# Altium PCB DC_AC_Inverter.PcbDoc (part 4 of 4)
Units mil, origin at the board's own origin, x right, y up, seen from the top; angles counter-clockwise.
Board outline 6496.06 x 4566.93 mil, 6 copper layers (L1, L2, L3, L4, L5, L6), stack 22.312 mil thick; 133 components, 65 nets, 349 pads, 134 vias.
Unrouted connection lines stored in the file: 226.
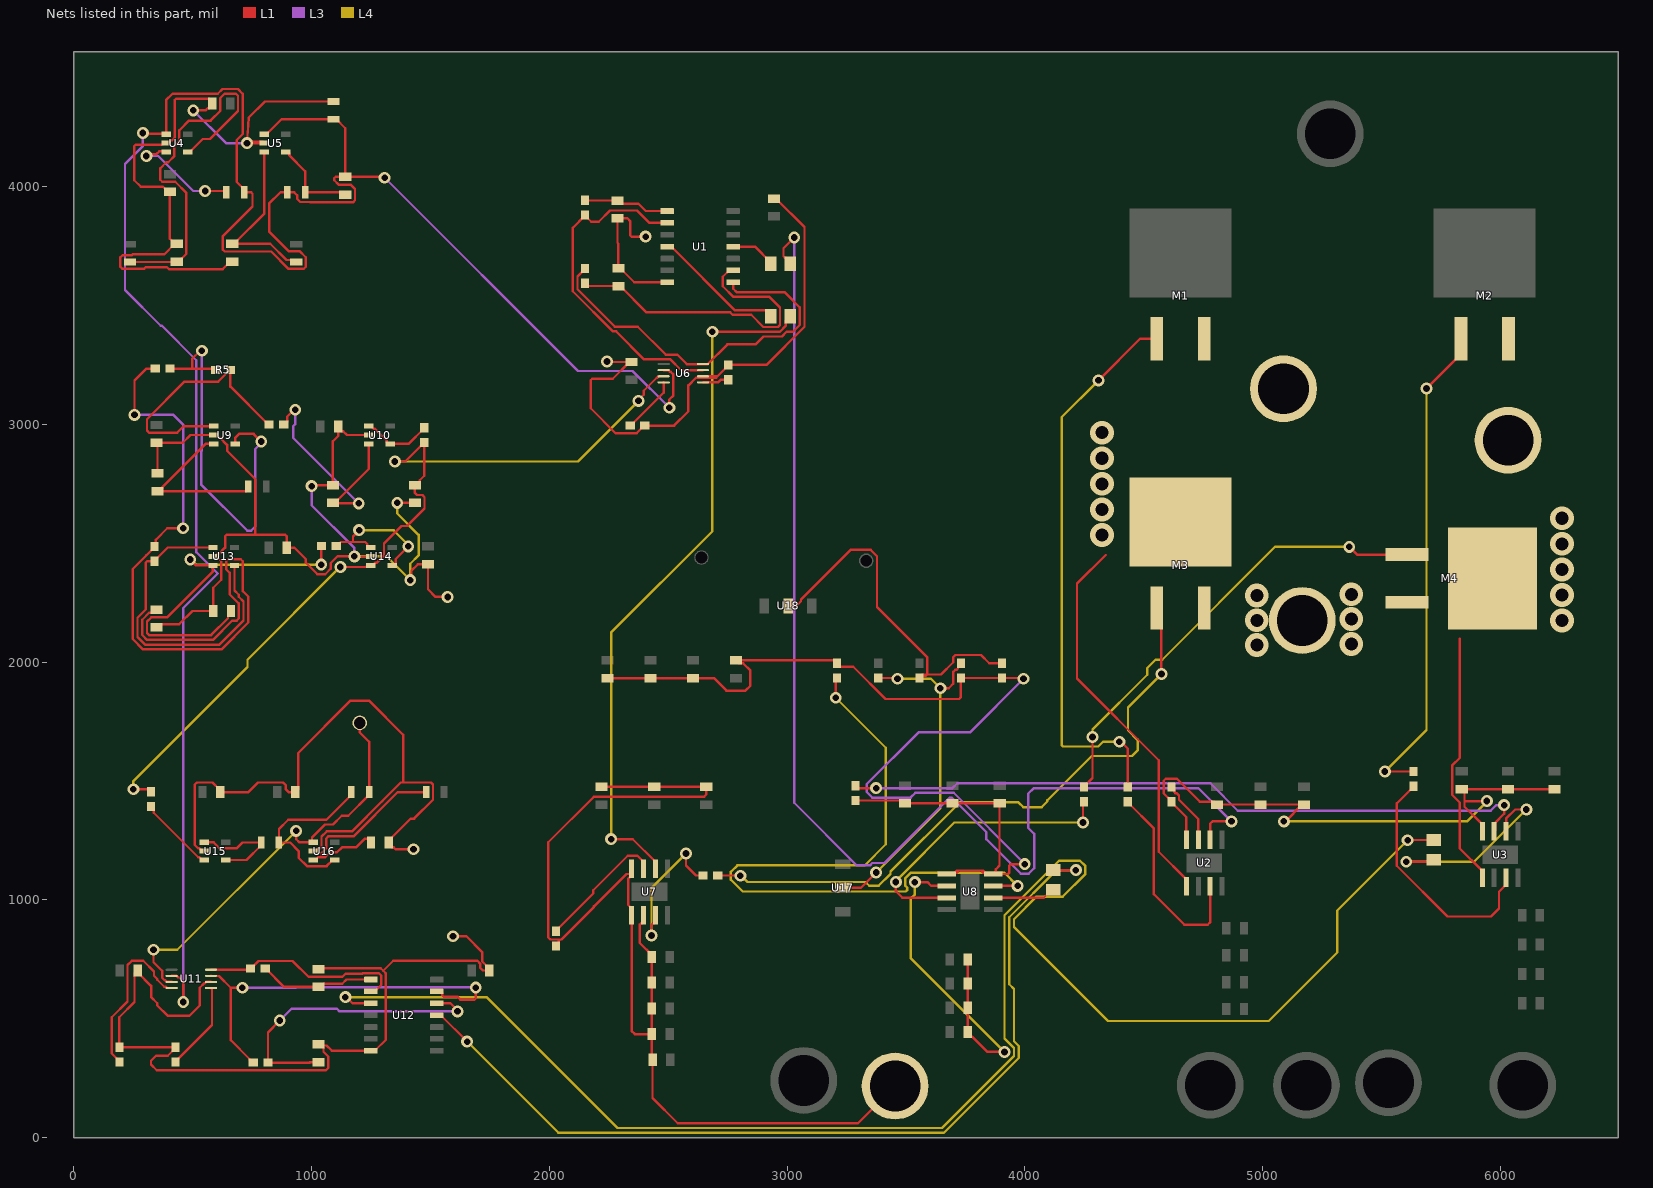
[diagram p6: the nets of this part, all layers, seen from the top]

## Via types
v1: diameter 50, hole 28, L1 to L6, 94 vias
v2: diameter 100, hole 55, L1 to L6, 26 vias
v3: diameter 80, hole 48, L1 to L6, 14 vias

## Nets (pads, with @x,y where several pads share a name; then routed paths per layer and width w, separated by ;. In a path a pad name is that pad's centre, name@x,y a point inside that pad or via, vN(x,y) a via of type N, cw(c..) or ccw(c..) an arc to the next point about the centre after c; other vN are vias at no path point) (continued)
GND: C1.2 C2.1 C4.2 C5.2 C7.1 C8.1 C9.1 C10.2 C11.1 C12.2 C13.2 C14.1 C15.1 C16.1 C17.1 C18.2 C19.2 C20.2 C21.2 C22.2 C23.2 C24.1 C25.2 C26.2 C27.2 C31.1 C34.1 C36.1 C37.1 C38.2 C39.2 C40.1 C41.2 C42.1 C43.1 C44.1 C45.1 C46.1 C47.1 C48.1 C49.1 C50.1 C51.1 C52.1 C53.1 C55.1 C56.1 C57.2 C58.1 M3.Source M4.Source P5.1 P6.1 R1.2 R19.2 R20.1 R21.2 R22.2 R23.1 R24.2 R28.1 R29.1 R33.1 R35.2 U1.7 U2.4 U3.4 U4.2 U5.2 U6.6 U7.4 U7.5 U7.6 U8.4 U8.5 U8.6 U9.2 U10.2 U11.6 U12.7 U13.2 U14.2 U15.2 U16.2 | length 30754.9
  L1 w10: C45.1@347.82,2146.18 360.54,2158.9 442.73,2158.9 498.91,2215.08 C49.1@585.94,2215.08 585.94,2313.09 619.51,2346.66 619.51,2424.09 604.98,2438.62 590.65,2438.62 U13.2@584.83,2444.45 593.68,2444.45 605.26,2456.02 610.73,2456.02 636.26,2481.56 636.26,2529.14 642.12,2535 763.02,2535 ; C42.1@351.69,2793.82 351.69,2918.88 C21.2@347.82,2922.76 457.92,2922.76 490.4,2955.24 U9.2@588.76,2955.24 597.62,2955.24 609.2,2943.66 614.66,2943.66 644.63,2913.69 644.63,2888.89 763.02,2770.5 763.02,2535 ; C39.2@432.41,3759.84 C39.2@424.54,3759.84 ; v1(501.97,4320.87) 553.15,4320.87 562.09,4329.8 569.96,4329.8 582.68,4342.52 C18.2@582.68,4350.39 ; 569.37,1193.23 557.8,1204.8 540.08,1204.8 528.5,1216.38 523.04,1216.38 508.35,1231.07 508.35,1484.64 517.13,1493.43 583.15,1493.43 615.87,1460.71 C26.2@615.87,1452.83 733.97,1452.83 774.56,1493.43 879.95,1493.43 891.53,1481.85 891.53,1464.41 903.11,1452.83 C27.2@930.83,1452.83 943.54,1465.55 943.54,1617.8 1163.65,1837.91 1241.31,1837.91 1385,1694.22 1385,1493.43 ; U11.6@576.77,654.53 556.85,654.53 550.59,648.27 547.5,648.27 529.28,630.05 529.28,555.33 485.44,511.5 395.26,511.5 350.83,555.93 350.83,564.53 324.8,590.55 324.8,637.79 267.72,694.88 C13.2@267.72,702.76 255,690.04 255,570.07 190.94,506.01 R24.2@190.94,379.43 R35.2@427.17,379.43 427.17,376.87 394.39,344.09 345.33,344.09 324.49,323.24 324.49,306.68 348.23,282.94 520.98,282.94 521.04,282.99 1060.15,282.99 1070.12,292.96 1070.12,340.82 1050.12,360.82 C5.2@1050.12,378.98 ; C18.2@582.68,4353.27 582.68,4357.36 569.96,4370.08 429.52,4370.08 423.66,4364.22 423.66,4204.61 413.69,4194.65 408.23,4194.65 396.65,4183.07 378.94,4183.07 373.11,4177.24 367.39,4177.24 367.25,4177.1 259.86,4177.1 254,4171.25 254,4027.26 280.83,4000.43 373.58,4000.43 395.67,3978.35 C19.2@403.54,3978.35 403.54,3780.84 C39.2@424.54,3759.84 ; C40.1@658.14,3685.04 625.42,3652.32 400.61,3652.32 391.82,3661.11 301.53,3661.11 294.71,3654.29 204.42,3654.29 195.63,3663.08 195.63,3703.06 204.42,3711.85 244.5,3711.85 247.75,3715.09 379.79,3715.09 C39.2@424.54,3759.84 ; v1@741.67,4196.4 749.17,4188.9 795.35,4188.9 U5.2@801.18,4183.07 v1(728.35,4183.07) 735.76,4290.76 803.27,4358.27 R1.2@1092.52,4358.27 ; v1(1000,2740) 1004.61,2744.61 C37.1@1089.23,2744.61 1089.23,2928.62 1111.93,2951.32 C20.2@1111.93,2983.78 ; U16.2@1006.98,1204.8 1015.84,1204.8 1027.42,1216.38 1032.88,1216.38 1041.67,1225.16 1041.67,1266.35 1063.35,1288.03 1168.57,1288.03 ; C5.2@1029.53,391.69 1033.96,387.26 1062.74,387.26 1085.32,364.68 1265.75,364.68 1312.56,411.5 1312.56,689.82 1301.19,701.19 ; C4.2@1029.53,708.66 1032.36,711.5 1290.88,711.5 1301.19,701.19 ; C20.2@1111.93,2991.65 C20.2@1111.93,2983.78 ; 1169.57,1288.03 1296.22,1414.69 ; U10.2@1240.73,2955.24 1148.35,2955.24 1132.52,2971.06 1124.65,2971.06 C20.2@1111.93,2983.78 ; U14.2@1248.61,2444.45 1180.55,2444.45 v1(1180,2445) 1109.1,2445 1080.67,2416.57 1080.67,2393.3 1057.24,2369.87 1024.1,2369.87 975.71,2418.26 975.71,2432.48 927.32,2480.87 C23.2@894.61,2480.87 894.61,2529.14 888.75,2535 763.02,2535 ; 1296.93,1415.39 1374.96,1493.43 1385,1493.43 ; v1(1360,2670) 1360.2,2669.8 C43.1@1434.37,2669.8 ; v1(1415,2345) 1420,2350 1420,2385 1446.97,2411.97 C22.2@1489.49,2411.97 1489.49,2306.36 1521.71,2274.13 v1(1572.17,2274.13) ; v1(1428.86,1212.68) 1353.07,1212.68 1345.12,1220.63 1337.24,1220.63 1324.53,1233.35 C41.2@1324.53,1241.22 1324.53,1249.09 1416.85,1341.42 1431.18,1341.42 1510.79,1421.03 1510.79,1484.64 1502,1493.43 1385,1493.43 ; v1(1594.73,846.46) 1651.06,846.46 1717.16,780.36 1717.16,741.5 1748.03,710.63 C25.2@1748.03,702.76 1720.31,702.76 1708.74,714.33 1708.74,731.77 1697.16,743.35 1343.35,743.35 1301.19,701.19 ; R22.2@2027.56,805.61 2039.49,817.54 2039.49,827.27 2045.35,833.13 ; C17.1@2218.83,1475.54 C16.1@2441.27,1475.54 C47.1@2660,1475.54 2660,1442.82 2650.92,1433.74 2187.31,1433.74 1995.63,1242.06 1995.63,841.91 2004.42,833.13 2045.35,833.13 ; v1(2242.91,3264.49) 2244.92,3262.48 C38.2@2337.36,3262.48 ; C9.1@2245,1932.6 C10.2@2425,1932.6 C11.1@2605,1932.6 2692.2,1932.6 2744.91,1879.88 2825.09,1879.88 2845.59,1900.38 2845.59,1964.81 2815.72,1994.68 2797.72,1994.68 C57.2@2785,2007.4 3198.07,2007.4 3210,1995.47 R21.2@3210,1995.13 3210,1992.57 3221.93,1980.65 3278.61,1980.65 3414.25,1845 3724.14,1845 3730,1850.86 3730,1931.88 R28.1@3731.25,1933.13 R29.1@3905,1933.13 3991.87,1933.13 v1(3995,1930) ; C38.2@2345.24,3262.48 C38.2@2337.36,3262.48 ; U7.4@2346.26,1127.12 U7.4@2346.26,1114.22 ; U7.6@2396.26,935.63 2396.26,907.09 2390.83,901.65 2385.86,901.65 2380,895.8 2380,819.02 2431.28,767.75 C51.1@2431.28,759.87 C53.1@2431.28,651.61 C34.1@2431.28,543.34 C55.1@2431.28,435.07 ; v1(2405,3790) 2345.86,3790 2340,3795.86 2340,3855 2328.15,3866.85 C1.2@2286.67,3866.85 2286.67,3763.77 2290.61,3759.83 C2.1@2290.61,3656.76 2298.48,3656.76 2357.56,3597.68 U1.7@2495.87,3597.68 ; U6.6@2646.46,3202.44 2707.54,3202.44 ; C24.1@2945.67,3949.53 2953.54,3949.53 3073.25,3829.82 3073.25,3410.42 2913.04,3250.21 R23.1@2752.76,3250.21 2752.76,3247.65 2707.54,3202.44 ; R20.1@3288.61,1418 3483.69,1418 C48.1@3495.96,1405.73 C31.1@3695.43,1405.73 C50.1@3894.91,1405.73 3893.87,1404.7 3893.87,1143.87 3878.04,1128.04 3878.04,1113.9 U8.4@3872.61,1108.46 ; P5.1@3527.62,216.54 P5.1@3454.72,216.54 3298.19,60 2540,60 2434.23,165.77 C12.2@2434.23,326.8 2431.28,329.76 C55.1@2431.28,435.07 ; v1(3537.78,1074.49) 3590.51,1074.49 3606.54,1058.46 U8.6@3671.85,1058.46 ; U8.5@3671.85,1108.46 3700.39,1108.46 U8.5@3705.83,1113.9 ; C58.1@3759.72,749.03 C36.1@3759.72,647.33 C56.1@3759.72,545.62 C52.1@3759.72,443.91 3759.72,436.04 3772.43,423.32 3780.31,423.32 3843.63,360 v1(3915,360) ; U8.4@3867.52,1108.46 U8.4@3872.61,1108.46 ; v1(4000,1150) 3940.86,1150 3935,1144.14 3935,1114.32 3929.14,1108.46 U8.4@3872.61,1108.46 ; R19.2@4616.8,1410.44 4680,1347.24 U2.4@4680,1252.83 ; R19.2@4616.8,1413 4616.8,1415.56 4584.87,1447.49 4584.87,1500.7 4593.66,1509.49 4639.94,1509.49 4736.43,1413 4795.81,1413 C14.1@4808.07,1400.73 C8.1@4991.47,1400.73 C46.1@5167,1400.73 ; v1(5090,1330) 5096.27,1330 C46.1@5167,1400.73 ; C46.1@5174.87,1400.73 C46.1@5167,1400.73 ; U3.4@5925,1287.83 5925,1316.38 5850,1391.38 5850,1415 ; v1(5944.22,1415.78) 5943.43,1415 5850,1415 ; C44.1@6228.96,1465.73 C7.1@6033.6,1465.73 C15.1@5838.24,1465.73 5850,1453.97 5850,1415 ; 2045.35,833.13 2050.7,833.13 2187.35,969.78 2187.35,972.13 2324.01,1108.79 2340.83,1108.79 U7.4@2346.26,1114.22 ; C38.2@2337.36,3262.48 2267.09,3192.21 2180.48,3192.21 2174.02,3185.75 2174.02,3067.64 2278.78,2962.87 2367.38,2962.87 2399.31,2994.8 2524.8,2994.8 2585,3055 2585,3163.99 2617.86,3196.85 2701.95,3196.85 2707.54,3202.44 ; U7.4@2346.26,1114.22 2346.26,1102.76 2331.46,1087.95 2331.46,978.98 2346.26,964.17 U7.5@2346.26,935.63 2346.26,448.74 2359.93,435.07 C55.1@2431.28,435.07 ; U8.5@3705.83,1113.9 3715.2,1123.27 3724.1,1123.27 ; U8.5@3705.83,1113.9 3714.73,1113.9 3724.1,1123.27 ; 3724.1,1123.27 3815.27,1123.27 ; 3815.27,1123.27 3824.17,1123.27 3833.54,1113.9 3824.64,1113.9 3815.27,1123.27
  L3 w10: v1(501.97,4320.87) 639.76,4183.07 v1(728.35,4183.07) ; v1(1000,2740) 1000,2660 1180,2480 v1(1180,2445) ; v1(3995,1930) 3769.46,1704.46 3552.89,1704.46 3335,1486.57 3335,1453.43 3358.43,1430 3519.74,1430 3539.74,1450 3701.05,1450 4000,1151.05 v1(4000,1150)
  L4 w10: v1(1180,2445) 1315,2445 v1(1415,2345) 1415,2413.7 1450,2448.7 1450,2535 1360,2625 v1(1360,2670) ; v1(3537.78,1074.49) 3537.78,1022.93 3520,1005.15 3520,755 v1(3915,360) ; v1(5090,1330) 5860,1330 5944.22,1414.22 v1(5944.22,1415.78)
  other v2: 4976.3,2071.61 5374.02,2076.54 4976.3,2175.85 5374.02,2180.77 4976.3,2280.08 5374.02,2285
NetC1_1: C1.1 R36.1 U1.1 | length 364.3
  L1 w10: R36.1@2150.39,3943.13 2151.87,3941.65 C1.1@2286.67,3941.65 2299.39,3928.94 2374.16,3928.94 2405.42,3897.68 U1.1@2495.87,3897.68
NetC2_2: C2.2 R37.1 U1.9 | length 1345.9
  L1 w10: R37.1@2150.39,3594.22 2150.39,3593.88 2162.32,3581.95 C2.2@2290.61,3581.95 2298.48,3581.95 2409.26,3471.18 2760.81,3471.18 2771.05,3460.94 2849.13,3460.94 2900.15,3409.92 2961.79,3409.92 2970.57,3418.71 2970.57,3492.16 2926.24,3536.49 2774.22,3536.49 2729.88,3580.83 2729.88,3620.87 2756.69,3647.68 U1.9@2773.43,3647.68
NetC4_1: C4.1 R38.1 U12.1 | length 489
  L1 w10: R38.1@804.62,710.63 807.18,710.63 883.95,633.86 1037.4,633.86 1050.12,646.57 1128.74,646.57 1146.85,664.68 U12.1@1249.02,664.68
NetC5_1: C5.1 R39.1 U12.12 | length 1287.8
  L1 w10: v1(866.14,492.13) 816.43,442.42 R39.1@816.43,314.92 992.17,314.92 ; 992.17,316.89 C5.1@1029.53,316.89 ; U12.12@1526.57,564.68 1584.47,564.68 1613.98,535.18 v1(1613.98,530.55)
  L3 w10: v1(866.14,492.13) 915.35,541.34 1106.09,541.34 1116.88,530.55 v1(1613.98,530.55)
NetC37_2: C37.2 R7.2 U10.3 | length 1023
  L1 w10: R7.2@882.34,2999.53 884.9,2999.53 896.83,3011.46 896.83,3032.13 926.23,3061.54 v1(931.06,3061.54) ; v1(1198.15,2667.83) 1091.19,2667.83 C37.2@1089.23,2669.8 1097.1,2669.8 1240.73,2813.44 U10.3@1240.73,2917.83
  L3 w10: v1(931.06,3061.54) 931.06,3001.32 922.56,2992.82 922.56,2943.43 v1(1198.15,2667.83)
NetC39_1: C39.1 R30.2 U4.4 | length 1579
  L1 w10: R30.2@236.22,3683.07 430.45,3683.07 C39.1@432.41,3685.04 440.29,3685.04 473.01,3717.76 473.01,3973.4 425.98,4020.43 371.74,4020.43 362.95,4029.22 362.95,4077.08 388.73,4102.85 396.71,4102.85 422.48,4128.63 422.48,4169.81 443.66,4190.99 443.66,4237.51 484.2,4278.05 574.85,4278.05 615.39,4318.59 615.39,4372.83 633.55,4390.98 681.41,4390.98 690.2,4382.2 690.2,4318.59 572.08,4200.47 542.01,4200.47 487.2,4145.67 U4.4@478.35,4145.67
NetC40_2: C40.2 R31.1 U5.3 | length 747.3
  L1 w10: U5.3@801.18,4145.67 801.18,3887.14 673.88,3759.84 C40.2@666.01,3759.84 825.97,3759.84 894.45,3691.36 926.75,3691.36 R31.1@935.04,3683.07
NetC41_1: C41.1 R34.1 U16.3 | length 875.5
  L1 w10: U16.3@1006.98,1167.4 1015.84,1167.4 1027.42,1178.98 1042.4,1178.98 ; C41.1@1249.72,1241.22 1249.72,1243.76 1237.01,1256.48 1222.87,1256.48 1187.02,1220.63 1127.69,1220.63 1106.86,1199.8 1078.21,1199.8 1057.39,1178.98 1042.4,1178.98 ; R34.1@1482.01,1452.83 1362.65,1452.83 1177.85,1268.03 1071.64,1268.03 1061.67,1258.06 1061.67,1216.88 1042.4,1197.61 1042.4,1178.98
NetC42_2: C42.2 R32.1 U9.3 | length 719
  L1 w10: U9.3@588.76,2917.83 554.08,2917.83 372.28,2736.04 372.28,2731.73 359.57,2719.02 C42.2@351.69,2719.02 725.46,2719.02 734.24,2727.8 R32.1@734.24,2738.7
NetC43_2: C43.2 R8.1 R25.2 U6.3 U14.3 | length 3616.6
  L1 w10: v1(250,1465) 315,1465 R25.2@325,1455 ; v1(1120.67,2400) 1228.06,2400 1229.28,2401.22 1242.78,2401.22 U14.3@1248.61,2407.05 1257.46,2407.05 1269.04,2418.62 1274.5,2418.62 1304.47,2448.59 1304.47,2498.89 1377.96,2572.38 1401.47,2572.38 1474.96,2645.87 1474.96,2693.73 1465.88,2702.81 1443.45,2702.81 1434.37,2711.89 C43.2@1434.37,2744.61 1442.24,2744.61 1454.96,2757.32 1454.96,2765.2 1473.74,2783.98 R8.1@1473.74,2921.68 ; v1(1350,2844) 1393.5,2844 1459.25,2909.75 1461.81,2909.75 R8.1@1473.74,2921.68 ; R8.1@1473.74,2924.24 R8.1@1473.74,2921.68 ; v1(2375,3099) 2375,3102.71 2397.15,3124.86 2397.15,3141.5 2451.84,3196.18 2454.92,3196.18 U6.3@2460.51,3201.77
  L4 w10: v1(250,1465) 250,1500 730,1980 730,2010 1120,2400 v1(1120.67,2400) ; v1(1350,2844) 2120,2844 v1(2375,3099)
NetC45_2: C45.2 R9.1 R40.1 | length 3267
  L1 w10: v1(255,3040) 255,3184 305.76,3234.76 R40.1@342.45,3234.76 ; C45.2@347.82,2220.98 335.1,2208.27 317.1,2208.27 287.23,2178.4 287.23,2113.97 307.73,2093.46 585.42,2093.46 666.44,2174.49 684.68,2174.49 693.46,2183.27 693.46,2246.88 655.38,2284.97 655.38,2375.32 640.69,2390.01 640.69,2424.09 649.48,2432.87 701.28,2432.87 710.06,2424.09 710.06,2298.81 733.46,2275.41 733.46,2166.71 620.22,2053.46 291.16,2053.46 247.23,2097.4 247.23,2391.73 304.7,2449.21 305.47,2449.21 339.94,2483.68 R9.1@339.94,2486.24 344.87,2491.16 344.87,2514.87 393,2563 v1@471,2563
  L3 w10: v1(255,3040) 419,3040 459.43,2999.57 v1(459.43,2563)
NetC49_2: C49.2 R10.1 U13.3 | length 1593.5
  L1 w10: v1(489.49,2431.61) 514.06,2407.05 U13.3@584.83,2407.05 584.83,2381.22 391.87,2188.27 325.38,2188.27 307.23,2170.11 307.23,2122.25 316.01,2113.46 577.14,2113.46 648.03,2184.36 648.03,2202.36 C49.2@660.75,2215.08 ; v1(1040.67,2409.87) 1040.67,2487.81 R10.1@1041.6,2488.74
  L4 w10: v1(489.49,2431.61) 493.6,2431.61 515.35,2409.87 v1(1040.67,2409.87)
NetC54_1: C54.1 R4.2 U5.4 | length 381.3
  L1 w10: U5.4@891.73,4145.67 900.59,4145.67 906.42,4139.84 906.42,4130.98 972.44,4064.96 R4.2@972.44,3976.38 1131.89,3976.38 C54.1@1141.73,3966.54
NetC54_2: C54.2 R1.1 R3.2 R4.1 U4.1 U5.1 U6.2 U11.2 | length 9327.3
  L1 w10: v1(290,4226) 292.76,4223.24 385.03,4223.24 U4.1@387.8,4220.47 387.8,4364.17 414.61,4390.98 605.27,4390.98 625.27,4410.98 689.69,4410.98 710.2,4390.48 710.2,4221.49 684.29,4195.58 684.29,4020.43 716.54,3988.19 R3.2@716.54,3976.38 745.32,3976.38 751.17,3970.52 751.17,3916.09 625.42,3790.34 625.42,3735.91 634.21,3727.13 830.4,3727.13 903.24,3654.29 966.84,3654.29 975.63,3663.08 975.63,3703.06 949.6,3729.09 903.24,3729.09 821.18,3811.15 821.18,3928.7 868.86,3976.38 R4.1@897.64,3976.38 926.42,3976.38 939.43,3963.36 939.43,3948.8 952.45,3935.79 992.43,3935.79 994.4,3933.82 1173.54,3933.82 1182.32,3942.61 1182.32,3990.47 1163.96,4008.83 1113.65,4008.83 1095.28,4027.2 1095.28,4035.48 1101.14,4041.34 C54.2@1141.73,4041.34 ; U11.2@411.42,680.12 431.34,680.12 437.6,673.86 440.68,673.86 460,654.54 v1(460,570) ; U5.1@801.18,4220.47 810.04,4220.47 873.03,4283.46 R1.1@1092.52,4283.46 1104.33,4283.46 1141.73,4246.06 C54.2@1141.73,4041.34 ; v1@1311,4034 1303.66,4041.34 C54.2@1141.73,4041.34 ; U6.2@2481.1,3228.03 2501.02,3228.03 2507.28,3221.77 2510.37,3221.77 2521.69,3210.45 2521.69,3121.69 2504.14,3104.14 2504.14,3070.86 v1(2505,3070)
  L3 w10: v1(290,4226) 290,4170.57 215,4095.57 215,3565.11 365.11,3415 370,3415 515,3270 515,2462.67 605,2372.67 460,2227.67 v1(460,570) ; v1(1307.33,4037.67) 2120.51,3224.49 2350.51,3224.49 v1(2505,3070)
NetM1_Gate: M1.Gate R15.1 | length 2379
  L1 w10: v1(4310,3185) 4485.24,3360.24 M1.Gate@4555.51,3360.24 ; v1(4398.04,1665) 4405.12,1665 4433.4,1636.72 R15.1@4433.4,1475
  L4 w10: v1(4310,3185) 4155,3030 4155,1650.86 4160.86,1645 4309.03,1645 4329.03,1665 v1(4398.04,1665)
NetM1_Source: M1.Source M3.Drain P3.1 U2.5 | length 1634.1
  L1 w10: 4340.55,2450.79 4220,2330.24 4220,1930.35 4563.47,1586.88 4563.47,1202.23 4680,1085.71 U2.5@4680,1057.17
  other v2: 4325,2535 4325,2642.5 4325,2750 4325,2857.5 4325,2965
NetM2_Gate: M2.Gate R16.2 | length 2072.8
  L1 w10: v1(5515,1540) R16.2@5635,1540 ; v1(5690,3151.22) 5835.04,3296.26 M2.Gate@5835.04,3360.24
  L4 w10: v1(5515,1540) 5690,1715 v1(5690,3151.22)
NetM2_Source: M2.Source M4.Drain P4.1 U3.5 | length 1073.2
  L1 w10: 5830,2099.23 5830,1596.82 5797.65,1564.47 5797.65,1441.8 5830,1409.45 5830,1215.71 5925,1120.71 U3.5@5925,1092.17
  other v2: 6260,2175 6260,2282.5 6260,2390 6260,2497.5 6260,2605
NetM3_Gate: M3.Gate R17.1 | length 2730.4
  L1 w10: R17.1@2708.17,1102.36 2802.64,1102.36 v1@2805,1100 ; M3.Gate@4555.51,2228.35 4575,2208.86 v1(4575,1950)
  L4 w10: v1(2803.82,1101.18) 2808.03,1101.18 2834.21,1075 3330.15,1075 3346.01,1059.14 3385.35,1059.14 3435,1108.79 3435,1118.43 3726.57,1410 3973.43,1410 3993.43,1390 4026.57,1390 4051.57,1390 4071.57,1390 4095,1413.43 4095,1418.43 4281.57,1605 4451.57,1605 4475,1628.43 4475,1672.89 4434.46,1713.43 4434.46,1809.46 v1(4575,1950)
NetM4_Gate: M4.Gate R18.2 | length 1926.7
  L1 w10: R18.2@4250,1475 4250,1477.56 4285,1512.56 v1(4285,1685) ; v1(5365,2485) 5397.64,2452.36 M4.Gate@5607.28,2452.36
  L4 w10: v1(4285,1685) 4285,1716.57 4515,1946.57 4515,1974.85 4550.15,2010 4578.43,2010 5053.43,2485 v1(5365,2485)
NetR2_1: R2.1 U1.11 | length 190.7
  L1 w10: U1.11@2773.43,3747.68 2865.1,3747.68 2930.97,3681.81 R2.1@2930.97,3675.91
NetR2_2: R2.2 U2.2 | length 5324.4
  L1 w10: R2.2@3013.65,3675.91 3013.65,3681.81 2994.04,3701.42 2990.86,3701.42 2985,3707.28 2985,3740.83 v1(3030.32,3786.14) ; U2.2@4780,1252.83 4780,1320 4790,1330 v1(4870,1330)
  L3 w10: v1(3030.32,3786.14) 3030.32,1408.12 3293.43,1145 3348.43,1145 3358.43,1155 3409.48,1155 3684.48,1430 3692.76,1430 3838.1,1284.67 3838.1,1255.33 3983.43,1110 4016.57,1110 4040,1133.43 4040,1277.5 4015,1302.5 4015,1446.57 4038.43,1470 4730,1470 v1(4870,1330)
NetR3_1: R3.1 U4.3 | length 492.1
  L1 w10: v1(305,4129) 312.65,4136.65 330.59,4136.65 330.86,4136.92 347.32,4136.92 358.97,4148.57 373.11,4148.57 376.01,4145.67 U4.3@387.8,4145.67 ; v1(552,3982) 636.11,3982 R3.1@641.73,3976.38
  L3 w10: v1(305,4129) 355,4129 502,3982 v1(552,3982)
NetR5_1: R5.1 R40.2 U9.4 | length 1693.2
  L1 w10: R40.2@404.45,3234.76 497.41,3234.76 ; v1(538.3,3309.89) 531.15,3309.89 497.41,3276.15 497.41,3234.76 ; R5.1@596.28,3228.86 590.38,3234.76 497.41,3234.76 ; U9.4@679.31,2917.83 679.31,2944.31 695,2960 756.16,2960 v1(788.01,2928.15)
  L3 w10: v1(538.3,3309.89) 538.3,2890.82 535,2887.52 535,2747.34 729.27,2553.07 745.84,2553.07 763.1,2570.32 763.1,2896.49 788.01,2921.4 v1(788.01,2928.15)
NetR5_2: R5.2 R7.1 U9.1 | length 1079.5
  L1 w10: U9.1@588.76,2992.64 461.86,2992.64 434.06,2964.84 316.01,2964.84 307.23,2973.63 307.23,3021.49 465.74,3180 606.87,3180 655.72,3228.86 R5.2@658.28,3228.86 658.28,3159.02 817.78,2999.53 R7.1@820.34,2999.53
NetR6_1: R6.1 U1.4 | length 559.6
  L1 w10: U1.4@2495.87,3747.68 2512.6,3747.68 2779.33,3480.94 2911.36,3480.94 2930.97,3461.34 R6.1@2930.97,3455.43
NetR6_2: R6.2 U7.2 | length 2933.3
  L1 w10: v1(2260,1255) 2351.1,1255 2446.26,1159.84 U7.2@2446.26,1131.3 ; v1(2685.83,3389.92) 2970.07,3389.92 2994.04,3413.89 2994.04,3435.83 R6.2@3013.65,3455.43
  L4 w10: v1(2260,1255) 2260,2124.36 2685.83,2550.19 v1(2685.83,3389.92)
NetR8_2: R8.2 U10.1 U10.4 | length 298.2
  L1 w10: U10.1@1240.73,2992.64 1249.59,2992.64 1261.17,2981.06 1266.63,2981.06 1316.6,2931.1 1316.6,2923.66 1322.43,2917.83 U10.4@1331.28,2917.83 1407.9,2917.83 1473.74,2983.68 R8.2@1473.74,2986.24
NetR9_2: R9.2 U13.1 U13.4 | length 1384.5
  L1 w10: R9.2@339.94,2424.24 308.02,2424.24 302.16,2418.38 302.16,2221.61 267.23,2186.68 267.23,2105.68 299.45,2073.46 611.94,2073.46 713.46,2174.99 713.46,2255.17 693.46,2275.17 693.46,2283.2 675.38,2301.29 U13.4@675.38,2407.05 ; R9.2@339.94,2426.8 395,2481.85 U13.1@584.83,2481.85
NetR10_2: R10.2 U14.1 U14.4 | length 579
  L1 w10: R10.2@1103.6,2488.74 1106.16,2488.74 1122.42,2505 1173.94,2505 ; v1(1200,2555) 1173.94,2528.94 1173.94,2505 ; U14.1@1248.61,2481.85 1239.75,2481.85 1233.92,2487.68 1233.92,2496.54 1225.46,2505 1173.94,2505 ; U14.4@1339.16,2407.05 1348.02,2407.05 1353.84,2412.87 1353.84,2433.84 v1(1406.72,2486.72)
  L4 w10: v1(1200,2555) 1345,2555 1406.72,2493.28 v1(1406.72,2486.72)
NetR11_1: R11.1 U15.1 U15.4 | length 445.5
  L1 w10: U15.1@548.94,1242.2 587.76,1242.2 613.59,1216.38 683.85,1216.38 708.7,1241.22 R11.1@787.74,1241.22 787.74,1229.41 725.73,1167.4 U15.4@639.49,1167.4
NetR11_2: R11.2 R12.1 U16.4 | length 735.6
  L1 w10: U16.4@1097.54,1167.4 1088.68,1167.4 1062.85,1141.58 981.09,1141.58 945.41,1177.26 945.41,1205.54 909.72,1241.22 R11.2@862.54,1241.22 862.54,1297.54 901.73,1336.73 1062.76,1336.73 1167.05,1441.02 R12.1@1167.05,1452.83
NetR12_2: R12.2 T15.T U11.3 U16.1 | length 1756.3
  L1 w10: v1(335,790) 335,737.11 370.83,701.28 370.83,672.11 382.15,660.79 385.24,660.79 391.5,654.53 U11.3@411.42,654.53 ; v1(935,1290) 935,1255 947.3,1242.7 1006.49,1242.7 U16.1@1006.98,1242.2 1001.36,1247.83 1001.36,1262.17 1055.92,1316.73 1090.37,1316.73 1127.08,1353.44 1154.26,1353.44 1241.85,1441.02 1241.85,1664.9 1202.48,1704.27 T15.T@1202.48,1744.17
  L4 w10: v1(335,790) 435,790 v1(935,1290)
NetR13_1: R13.1 U3.2 | length 869.5
  L1 w10: v1(5605,1160) 5711.34,1160 R13.1@5720,1168.66 ; U3.2@6025,1287.83 6025,1341.72 6063.28,1380 v1(6110,1380)
  L4 w10: v1(5605,1160) 5890,1160 v1(6110,1380)
NetR13_2: R13.2 U12.3 | length 7131.5
  L1 w10: v1(1141.73,590.55) 1146.57,590.55 1172.43,564.68 U12.3@1249.02,564.68 ; v1@5610,1250 5611.34,1251.34 R13.2@5720,1251.34
  L4 w10: v1(1141.73,590.55) 1735.77,590.55 2286.33,40 3651.57,40 3955,343.43 3955,376.57 3915,416.57 3915,934.85 4145.15,1165 4231.57,1165 4255,1141.57 4255,1108.43 4159.93,1013.36 4050.07,1013.36 3955,918.28 3955,885.15 4350.15,490 5026.57,490 5314.79,778.22 5314.79,954.79 v1(5610.67,1250.67)
NetR14_1: R14.1 U8.2 | length 266.5
  L1 w10: U8.2@3867.52,1008.46 4080.24,1008.46 4114.09,1042.32 R14.1@4120,1042.32
NetR14_2: R14.2 U12.11 | length 3849.1
  L1 w10: U12.11@1526.57,514.68 1543.31,514.68 v1(1654.45,403.54) ; R14.2@4120,1125 v1(4215,1125)
  L4 w10: v1(1654.45,403.54) 2037.99,20 3659.85,20 3975,335.15 3975,384.85 3955,404.85 3955,625 3935,645 3935,926.57 4133.43,1125 v1(4215,1125)
NetR15_2: R15.2 U2.7 | length 881.4
  L1 w10: R15.2@4433.4,1413 4433.4,1410.44 4543.47,1300.37 4543.47,1023.15 4671.62,895 4770,895 4780,905 U2.7@4780,1057.17
NetR16_1: R16.1 U3.7 | length 1037
  L1 w10: R16.1@5635,1478 5635,1475.44 5565,1405.44 5565,1143.43 5778.43,930 5961.57,930 5995,963.43 5995,1033.62 6025,1063.62 U3.7@6025,1092.17
NetR17_2: R17.2 U7.7 | length 639.2
  L1 w10: v1(2430,850) 2430,895.8 2435.86,901.65 2440.83,901.65 2446.26,907.09 U7.7@2446.26,935.63 ; v1(2575,1195) 2575,1145 2617.54,1102.46 2646.06,1102.46 R17.2@2646.17,1102.36
  L4 w10: v1(2430,850) 2430,1050 v1(2575,1195)
NetR18_1: R18.1 U8.7 | length 1248
  L1 w10: v1(3457.78,1075) 3457.78,1035.82 3485.13,1008.46 U8.7@3671.85,1008.46 ; v1(4245,1325) 4245,1408 R18.1@4250,1413
  L4 w10: v1(3457.78,1075) 3457.78,1079.35 3703.43,1325 v1(4245,1325)
NetR19_1: R19.1 U2.3 | length 272.2
  L1 w10: R19.1@4616.8,1475 4628.73,1463.07 4628.73,1453.35 4634.59,1447.49 4639.94,1447.49 4648.73,1438.7 4648.73,1421.27 4730,1340 U2.3@4730,1252.83
NetR20_2: R20.2 U3.3 | length 2925.5
  L1 w10: R20.2@3288.61,1480 3298.61,1470 v1(3375,1470) ; U3.3@5975,1287.83 5980.43,1293.27 5980.43,1325.43 6016.72,1361.72 v1(6016.72,1398.28)
  L3 w10: v1(3375,1470) 3696.2,1470 3716.2,1490 4781.38,1490 4896.38,1375 5960,1375 5982.57,1397.57 6016.01,1397.57 v1(6016.72,1398.28)
NetR21_1: R21.1 U8.3 | length 2956.8
  L1 w10: v1(3205,1850) 3205,1928.13 R21.1@3210,1933.13 ; U8.3@3867.52,1058.46 v1@3980.82,1058.46
  L4 w10: v1(3205,1850) 3415,1640 3415,1233.43 3326.57,1145 2791.07,1145 2763.82,1117.75 2763.82,1084.61 2813.43,1035 3499.14,1035 3505,1040.86 3505,1051.57 3497.78,1058.79 3497.78,1091.06 3521.21,1114.49 3913.97,1114.49 v1(3970,1058.46)
NetR22_1: R22.1 U7.3 | length 548.5
  L1 w10: R22.1@2027.56,867.61 2027.56,870.17 2184.55,1027.16 2184.55,1040.21 2329.61,1185.28 2370.83,1185.28 2396.26,1159.84 U7.3@2396.26,1131.3
NetR23_2: R23.2 U6.5 | length 111
  L1 w10: U6.5@2646.46,3176.85 2710.24,3176.85 2721.6,3188.21 R23.2@2752.76,3188.21
NetR24_1: R24.1 U11.4 | length 679
  L1 w10: R24.1@193.13,319.61 159.02,353.72 159.02,506.15 225.63,572.76 225.63,725.19 243.79,743.35 291.65,743.35 336.9,698.09 336.9,680.45 350.83,666.52 350.83,663.83 380.13,634.53 385.91,634.53 U11.4@390.83,629.61
NetR25_1: R25.1 U15.3 | length 326.7
  L1 w10: R25.1@325,1393 335.82,1382.18 335.82,1366.19 523.04,1178.98 528.5,1178.98 540.08,1167.4 U15.3@548.94,1167.4
NetR26_1: R26.1 R28.2 U17.2 | length 1498.6
  L1 w10: U17.2@3233.66,1050.2 3310.2,1050.2 v1(3375,1115) ; R26.1@3383.75,1933.13 3461.87,1933.13 v1(3465,1930) ; v1(3645,1890) 3680,1890 3699.32,1909.32 3699.32,1958.84 3708.11,1967.62 3713.46,1967.62 3719.32,1973.48 3719.32,1983.2 R28.2@3731.25,1995.13
  L4 w10: v1(3375,1115) 3645,1385 v1(3645,1890) 3605,1930 v1(3465,1930)
NetR27_1: R27.1 R29.2 U18.2 | length 1506.8
  L1 w10: U18.2@3004.38,2236.09 3039.06,2236.09 3058.77,2255.8 3058.77,2263.87 3266.76,2471.85 3351.82,2471.85 3378.48,2445.19 3378.48,2231.78 3589.43,2020.84 3589.43,1947.62 ; R27.1@3557.5,1933.13 3566.13,1941.76 3583.57,1941.76 3589.43,1947.62 ; R27.1@3569.43,1947.62 3589.43,1947.62 ; R29.2@3905,1995.13 3850.88,1995.13 3816.39,2029.62 3708.11,2029.62 3699.32,2020.84 3699.32,1999.32 3647.62,1947.62 3589.43,1947.62
NetR33_2: R33.2 U6.4 | length 242
  L1 w10: R33.2@2339.87,2994.8 2342.43,2994.8 2481.1,3133.48 U6.4@2481.1,3176.85
NetR35_1: R35.1 U11.5 | length 380.4
  L1 w10: R35.1@424.7,314.96 424.7,317.52 580.71,473.53 580.71,625.37 577.14,628.94 U11.5@576.77,628.94
NetR36_2: R36.2 U1.2 U6.7 | length 1425.3
  L1 w10: R36.2@2150.39,3881.13 R36.2@2150.39,3878.57 ; U1.2@2495.87,3847.68 2421.35,3847.68 2369.46,3899.57 2254.87,3899.57 2207.8,3852.5 2176.47,3852.5 R36.2@2150.39,3878.57 ; U6.7@2646.46,3228.03 2555.29,3228.03 2509.7,3273.62 2398.61,3273.62 2281.17,3391.07 2267.63,3391.07 2098.46,3560.23 2098.46,3826.64 R36.2@2150.39,3878.57
NetR37_2: R37.2 U1.8 U6.8 | length 1647.2
  L1 w10: R37.2@2150.39,3656.22 2150.39,3653.66 2118.46,3621.73 2118.46,3568.52 2275.91,3411.07 2372.25,3411.07 2489.7,3293.62 2537.78,3293.62 2577.78,3253.62 2666.38,3253.62 2749.26,3336.5 2867.35,3336.5 2900.77,3369.92 2978.36,3369.92 2998.36,3389.92 3024.47,3389.92 3053.25,3418.71 3053.25,3492.16 2988.92,3556.49 2787.8,3556.49 2773.43,3570.87 U1.8@2773.43,3597.68
NetR38_2: R38.2 U11.8 U12.2 | length 863.9
  L1 w10: U11.8@576.77,705.71 737.7,705.71 R38.2@742.62,710.63 745.18,710.63 777.11,742.56 920.16,742.56 986.78,675.94 1129.83,675.94 1142.54,688.66 1212.6,688.66 1215.44,691.5 1282.6,691.5 1292.56,681.53 1292.56,641.5 1265.75,614.68 U12.2@1249.02,614.68
NetR39_2: R39.2 U11.7 U12.13 | length 1722.9
  L1 w10: U11.7@576.77,680.12 577.44,679.45 609.92,679.45 659.45,629.92 ; v1(708.66,629.92) 659.45,629.92 ; R39.2@754.43,314.92 751.87,314.92 739.94,326.85 739.94,329.41 659.45,409.91 659.45,629.92 ; U12.13@1526.57,614.68 1542.82,614.68 1549.63,607.87 1549.63,597.35 1555.49,591.5 1614.33,591.5 1625.83,580 1684.67,580 1690.52,585.86 v1(1690.52,630.55)
  L3 w10: v1(708.66,629.92) 933.66,629.92 935.1,631.37 1689.71,631.37 v1(1690.52,630.55)
pads on no net: U1.3 U1.5 U1.6 U1.10 U1.12 U1.13 U2.9 U3.9 U7.9 U8.9 U12.4 U12.5 U12.6 U12.8 U12.9 U12.10

## Polygon pours and split planes (outlines as drawn)
+20V_2 on L1 "+20V_2_L01_P042" (solid, pour order 42): 6105,1140 6140,1105 6140,510 6270,380 6270,135 6195,60 5930,60 5840,150 5840,435 6047.5,642.5 6047.5,1130 6055.83,1140
NetM2_Source on L1 "NETM2_SOURCE_L01_P061" (solid, pour order 61): 6248.85,3462.68 5991,3462.68 5928.94,3400.62 5928.94,3085.66 5853.2,3009.93 5853.2,2655.6 5813.83,2616.22 5744.94,2547.33 5744.94,2114.26 5774.46,2084.73 6266.59,2084.73 6325.64,2143.78 6325.64,3398.69
+170 on L1 "+170_L01_P060" (solid, pour order 60): 5174.11,4377.5 5075.68,4279.08 5075.68,4072.38 4967.41,3964.12 4386.7,3964.12 4317.81,3895.22 4317.81,3550.73 4367.02,3501.52 6217.41,3501.52 6256.78,3540.89 6256.78,3914.9 6197.73,3973.96 5567.81,3973.96 5489.07,4052.7 5489.07,4298.76 5410.33,4377.5
NetM1_Source on L1 "NETM1_SOURCE_L01_P059" (solid, pour order 59): 4846.37,3467.18 4905.43,3408.13 4994.01,3319.54 5200.7,3319.54 5279.44,3240.8 5279.44,3004.58 5220.39,2945.53 4994.01,2945.53 4944.8,2896.32 4944.8,2433.72 4895.58,2384.5 4364.18,2384.5 4204.46,2544.23 4204.46,2977.56 4619.99,3279.46 4619.99,3437.65 4661.33,3467.18
GND on L1 "GND_L01_P062" (solid, pour order 62): 4752.6,2341.21 4705.36,2307.46 4705.36,2055.78 4754.57,2006.56 5660.08,2006.56 5719.14,2065.62 5719.14,2085.3 5719.14,2292 5669.92,2341.21
+20V on L1 "+20V_L01_P040" (solid, pour order 40): 3695.47,397.8 3725,427.33 3725,968.67 3705.67,988 2489,988 2467,966 2467,277.85 2475,269.85 2839.17,269.85 2898.23,210.8 2898.23,102.53 2917.91,82.84 3173.82,82.84 3285,194.02 3285,350.78 3317.3,375 3649.87,375
+20V_1 on L1 "+20V_1_L01_P041" (solid, pour order 41): 4866.67,1105 4890,1091 4890,415 4945,345 4945,95 4900,50 4565,50 4505,110 4505,475 4800,770 4800,1095 4810,1105
NetM1_Source on L1 "NETM1_SOURCE_L01_P024" (solid, pour order 24): 4842.52,3464.57 4901.57,3405.51 4990.16,3316.93 5196.85,3316.93 5275.59,3238.19 5275.59,3001.97 5216.54,2942.91 4990.16,2942.91 4940.94,2893.7 4940.94,2431.1 4891.73,2381.89 4409.45,2381.89 4271.65,2519.69 4271.65,2950.83 4616.14,3201.11 4616.14,3435.04 4657.48,3464.57
NetM2_Source on L1 "NETM2_SOURCE_L01_P030" (solid, pour order 30): 6254.96,3467 5997.1,3467 5935.04,3404.94 5935.04,3089.97 5859.31,3014.24 5859.31,2659.91 5819.94,2620.54 5751.04,2551.64 5751.04,2118.57 5780.57,2089.05 6272.69,2089.05 6331.75,2148.1 6331.75,3403
GND on L1 "GND_L01_P033" (solid, pour order 33): 4751.97,2342.52 4704.72,2308.77 4704.72,2057.09 4753.94,2007.87 5659.45,2007.87 5718.5,2066.93 5718.5,2086.61 5718.5,2293.31 5669.29,2342.52
+170 on L1 "+170_L01_P018" (solid, pour order 18): 5177.17,4379.92 5078.74,4281.5 5078.74,4074.8 4970.47,3966.54 4389.76,3966.54 4320.87,3897.64 4320.87,3553.15 4370.08,3503.94 6220.47,3503.94 6259.84,3543.31 6259.84,3917.32 6200.79,3976.38 5570.87,3976.38 5492.13,4055.12 5492.13,4301.18 5413.39,4379.92
+20V_1 on L3 "+20V_1_L03_P048" (solid, pour order 48): 4867.7,1100.39 4891.03,1086.39 4891.03,410.39 4946.03,340.39 4946.03,90.39 4901.03,45.39 4569.61,45.39 4500,115 4500,470 4801.03,771.03 4801.03,1090.39 4811.03,1100.39
+20V_2 on L3 "+20V_2_L03_P049" (solid, pour order 49): 6105,1140 6140,1105 6140,510 6270,380 6270,135 6195,60 5930,60 5840,150 5840,435 6047.5,642.5 6047.5,1130 6055.83,1140
+20V on L3 "+20V_L03_P047" (solid, pour order 47): 3696.43,397.08 3725.95,426.6 3725.95,967.94 3706.62,987.27 2489.95,987.27 2467.95,965.27 2467.95,277.12 2475.95,269.12 2840.13,269.12 2899.18,210.07 2899.18,101.8 2918.87,82.11 3174.77,82.11 3285,192.34 3285,356.71 3312.57,377.39 3322.41,377.39 3657.06,377.39
NetM2_Source on L3 "NETM2_SOURCE_L03_P053" (solid, pour order 53): 6251.9,3463.32 5994.05,3463.32 5931.99,3401.26 5931.99,3086.3 5856.25,3010.56 5856.25,2656.23 5816.88,2616.86 5747.99,2547.97 5747.99,2114.9 5777.51,2085.37 6269.64,2085.37 6328.69,2144.42 6328.69,3399.33
GND on L3 "GND_L03_P045" (solid, pour order 45): 4749.41,2339.99 4702.17,2306.24 4702.17,2054.55 4751.38,2005.34 5656.89,2005.34 5715.95,2064.39 5715.95,2084.08 5715.95,2290.77 5666.73,2339.99
NetM1_Source on L3 "NETM1_SOURCE_L03_P044" (solid, pour order 44): 4846.92,3467.95 4905.97,3408.89 4994.55,3320.31 5201.25,3320.31 5279.99,3241.57 5279.99,3005.35 5220.93,2946.3 4994.55,2946.3 4945.34,2897.08 4945.34,2434.49 4896.13,2385.27 4364.73,2385.27 4205,2545 4205,2978.33 4620.54,3280.23 4620.54,3438.42 4661.88,3467.95
+170 on L3 "+170_L03_P043" (solid, pour order 43): 5177.17,4379.92 5078.74,4281.5 5078.74,4074.8 4970.47,3966.54 4389.76,3966.54 4320.87,3897.64 4320.87,3553.15 4370.08,3503.94 6220.47,3503.94 6259.84,3543.31 6259.84,3917.32 6200.79,3976.38 5570.87,3976.38 5492.13,4055.12 5492.13,4301.18 5413.39,4379.92
NetM1_Source on L6 "NETM1_SOURCE_L06_P051" (solid, pour order 51): 4846.57,3465.87 4905.63,3406.81 4994.21,3318.23 5200.91,3318.23 5279.65,3239.49 5279.65,3003.27 5220.59,2944.21 4994.21,2944.21 4945,2895 4945,2432.4 4895.79,2383.19 4361.81,2383.19 4200,2545 4200,2972.43 4620.2,3277.71 4620.2,3436.34 4661.54,3465.87
NetM2_Source on L6 "NETM2_SOURCE_L06_P046" (solid, pour order 46): 6254.96,3467 5997.1,3467 5935.04,3404.94 5935.04,3089.97 5859.31,3014.24 5859.31,2659.91 5819.94,2620.54 5751.04,2551.64 5751.04,2118.57 5780.57,2089.05 6272.69,2089.05 6331.75,2148.1 6331.75,3403
GND on L6 "GND_L06_P052" (solid, pour order 52): 4749.82,2340.39 4702.58,2306.65 4702.58,2054.96 4751.79,2005.75 5657.3,2005.75 5716.36,2064.8 5716.36,2084.49 5716.36,2291.18 5667.14,2340.4
+170 on L6 "+170_L06_P050" (solid, pour order 50): 5177.17,4379.92 5078.74,4281.5 5078.74,4074.8 4970.47,3966.54 4389.76,3966.54 4320.87,3897.64 4320.87,3553.15 4370.08,3503.94 6220.47,3503.94 6259.84,3543.31 6259.84,3917.32 6200.79,3976.38 5570.87,3976.38 5492.13,4055.12 5492.13,4301.18 5413.39,4379.92
GND on L5 "GND_L05_P064" (solid, pour order 64): 237.5,4540 32.5,4335 32.5,130 147.5,15 6342.5,15 6452.5,125 6452.5,4420 6332.5,4540 227.5,4540
GND on L2 "GND_L02_P063" (solid, pour order 63): 240,4555 35,4350 35,145 150,30 6345,30 6455,140 6455,4435 6335,4555 230,4555